# Altium PCB PCB1.PcbDoc (part 2 of 3)
Units mm, origin at the board's own origin, x right, y up, seen from the top; angles counter-clockwise.
Board outline 131.32 x 71.5 mm, 2 copper layers (Top Layer, Bottom Layer); 122 components, 132 nets, 671 pads, 363 vias.
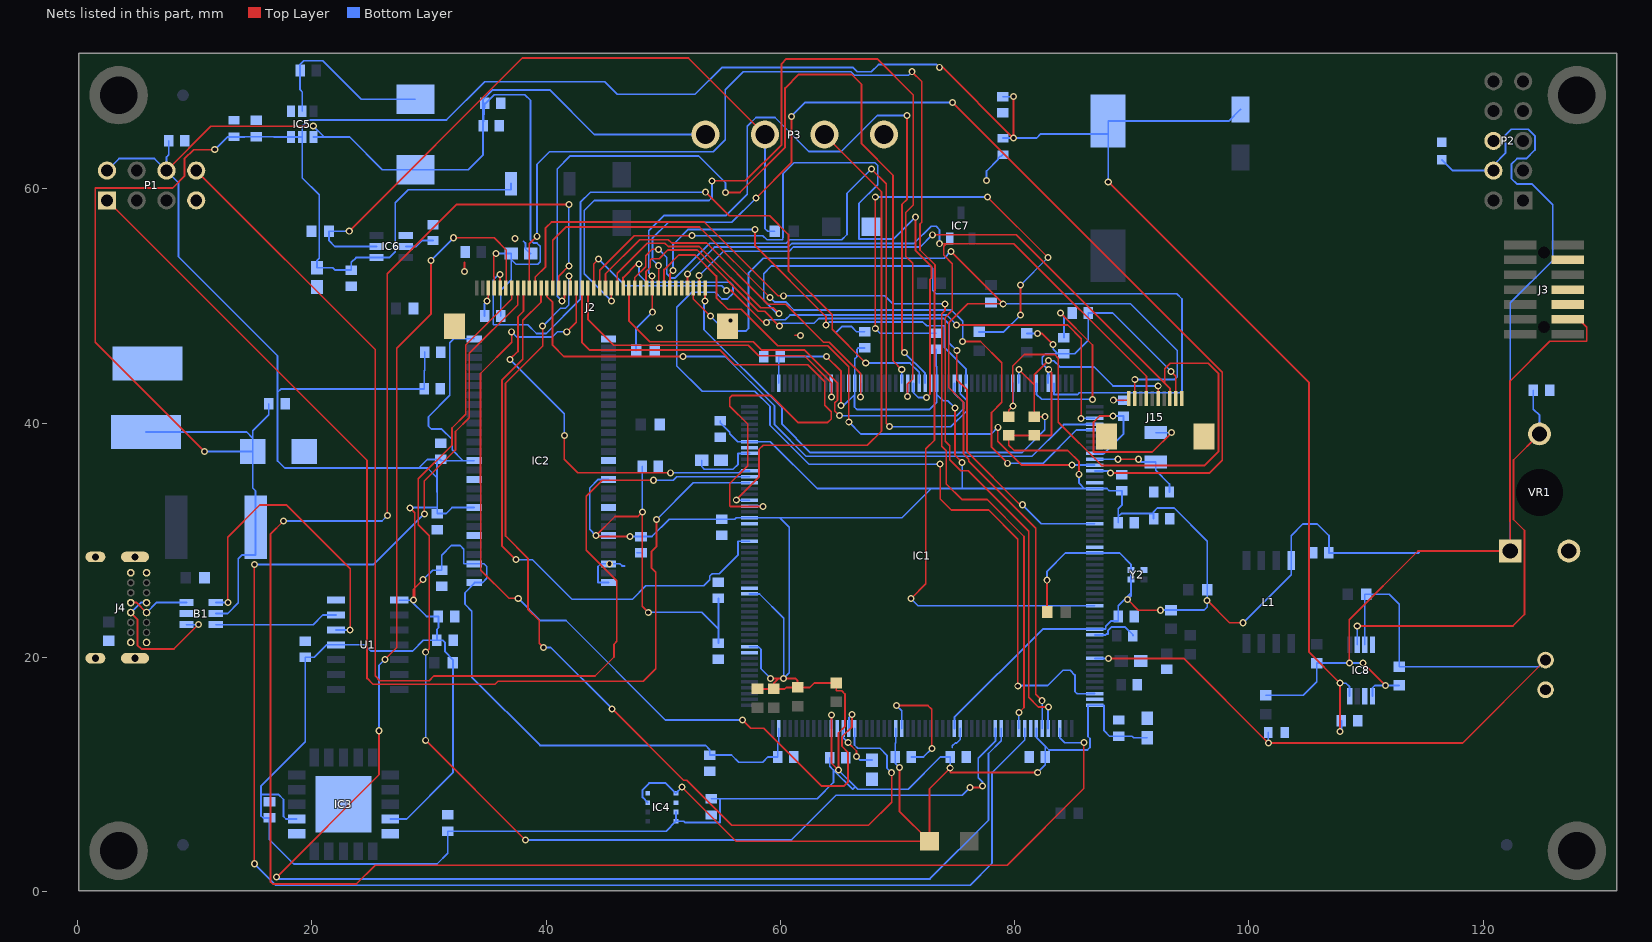
[diagram p2: the nets of this part, all layers, seen from the top]

## Via types
v1: diameter 0.6, hole 0.35, Top Layer to Bottom Layer, 363 vias

## Nets (pads, with @x,y where several pads share a name; then routed paths per layer and width w, separated by ;. In a path a pad name is that pad's centre, name@x,y a point inside that pad or via, vN(x,y) a via of type N, cw(c..) or ccw(c..) an arc to the next point about the centre after c; other vN are vias at no path point)
3V3: "Ferrite Chip Bead.1" C3.1 C4.2 C9.2 C10.2 C11.2 C12.2 C13.2 C14.2 C15.2 C16.2 C17.2 C18.2 C19.2 C20.2 C21.2 C24.2 C25.2 C26.2 C27.2 C28.2 C29.2 C30.2 C33.2 C34.2 C35.1 C36.2 C37.2 C46.2 C47.2 C49.2 C50.2 C51.2 C52.2 C55.2 C56.2 C57.1 C58.2 C59.1 C60.2 C61.2 C62.2 IC1.15 IC1.26 IC1.39 IC1.52 IC1.59 IC1.73 IC1.83 IC1.94 IC1.103 IC1.115 IC1.124 IC1.137 IC1.150 IC1.158 IC1.171 IC1.185 IC1.204 IC2.1 IC2.3 IC2.9 IC2.14 IC2.27 IC2.43 IC2.49 IC3.7 IC3.19 IC4.2 IC4.5 IC4.6 IC4.8 IC5.1 IC8.5 J2.4 J3.3 J15.9 L1.8 L3.2 LED1.1 P1.2 P1.6 P2.4 P3.4 R2.1 R3.2 R4.1 R6.1 R9.2 R10.2 R11.1 R12.1 R13.1 R14.1 R17.2 R18.2 R24.1 U1.1 U1.11 VR1.A1 Y2.1 Y2.4 | length 908.3
  Top Layer w0.15: P1.6@7.587,61.562 11.379,65.354 v1(20.117,65.354) ; v1(28.372,32.771) 28.778,32.365 28.778,25.93 ; v1(29.489,26.641) 28.778,25.93 ; J2.4@35.567,51.529 35.567,52.444 35.535,52.476 35.535,54.305 v1(35.712,54.483) ; v1(47.168,30.328) 44.323,30.328 v1(44.247,30.404) 45.878,32.035 47.834,32.035 v1(48.209,32.41) 48.209,24.359 v1(48.717,23.851) ; v1(51.6,8.928) 56.21,4.318 LED1.1@72.722,4.318 ; R9.2@58.039,17.31 R11.1@59.436,17.31 ; v1(59.157,18.212) 59.842,18.212 ; v1(63.925,45.687) 65.178,44.434 v1(65.178,41.521) ; v1(64.364,15.088) 64.364,10.978 v1(64.961,10.38) 64.961,13.55 65.507,14.096 65.507,16.876 65.227,17.155 64.77,17.155 R12.1@64.77,17.818 62.886,17.818 62.505,17.437 R10.2@61.468,17.437 ; v1(70.16,10.617) 70.16,6.88 LED1.1@72.722,4.318 ; v1(74.905,41.3) 74.905,37.262 v1(75.514,36.652) ; v1(81.94,47.65) 82.347,47.65 v1(83.287,46.711) ; v1(81.966,10.185) 74.494,10.185 v1(74.494,10.566) 72.722,8.794 LED1.1@72.722,4.318 ; R4.1@82.766,23.876 v1(82.766,26.594) ; v1(82.906,44.577) 83.134,44.348 83.134,38.976 83.109,38.951 R17.2@81.661,38.951 R18.2@79.502,38.951 79.502,38.125 79.959,37.668 84.531,37.668 85.496,36.703 v1(85.496,35.636) ; v1(89.637,24.943) 90.551,24.028 v1(92.431,24.028) ; v1(93.344,44.425) 93.75,44.018 J15.9@93.75,42.114 ; v1(96.431,24.867) 98.336,22.962 v1(99.502,22.962) ; v1(108.572,19.52) 108.56,19.533 108.56,23.216 114.427,29.083 VR1.A1@122.308,29.083 122.308,31.558 122.283,31.583 122.283,43.594 125.679,46.99 128.841,46.99 128.841,48.184 128.163,48.862 J3.3@127.221,48.862 ; v1(109.741,19.52) v1(111.646,17.615) ; 28.778,25.93 28.677,25.828 v1(28.677,24.892) 28.778,24.994 28.778,25.93 ; R11.1@59.436,17.31 59.436,17.805 59.842,18.212 ; R11.1@59.436,17.31 60.376,17.31 60.503,17.437 R10.2@61.468,17.437 ; 59.842,18.212 v1(60.274,18.212) 61.265,18.212 61.468,18.009 R10.2@61.468,17.437
  Bottom Layer w0.15: P1.2@2.507,61.562 3.531,62.586 6.563,62.586 P1.6@7.587,61.562 ; C57.1@7.786,64.102 7.786,62.912 7.587,62.713 P1.6@7.587,61.562 ; IC3.7@18.7,6.21 17.793,6.21 17.577,6.426 17.577,7.874 17.145,8.306 15.646,8.306 ; v1(20.117,65.354) 21.031,64.44 ; IC5.1@20.127,64.433 20.127,64.44 21.031,64.44 ; IC3.19@26.7,6.21 28.092,6.21 32.042,10.16 R24.1@32.042,19.558 32.042,19.812 31.373,20.481 31.373,21.26 31.17,21.463 C60.2@30.679,21.463 ; U1.1@27.465,24.892 v1@28.397,24.892 ; v1(28.372,32.771) 28.402,32.801 30.698,32.801 ; v1(28.677,24.892) v1@28.397,24.892 ; v1(29.489,26.641) 30.302,27.454 C28.2@31.082,27.454 31.082,28.737 31.902,29.557 32.656,29.557 32.969,29.244 32.969,27.997 IC2.3@33.863,27.997 34.69,27.997 34.925,27.762 34.925,26.746 34.576,26.397 IC2.1@33.934,26.397 ; C30.2@29.63,46.068 29.63,44.514 29.591,44.475 C55.2@29.591,42.926 17.374,42.926 17.069,42.621 ; IC2.1@33.863,26.397 IC2.1@33.934,26.397 ; IC2.9@33.863,32.797 31.971,32.797 31.454,32.28 C25.2@30.701,32.28 ; IC2.14@33.863,36.797 32.901,36.797 ; IC2.27@33.863,47.197 32.106,47.197 31.775,46.867 31.775,42.367 29.955,40.547 29.955,39.751 30.209,39.497 31.09,39.497 31.979,38.608 31.979,37.719 32.901,36.797 ; C46.2@34.743,67.31 C46.2@34.743,67.23 ; v1(35.712,54.483) C35.1@37.019,54.483 37.019,53.975 ; C34.2@36.123,49.149 36.123,51.359 37.019,52.255 37.019,53.975 ; IC2.49@45.319,30.397 44.254,30.397 v1(44.247,30.404) 43.713,30.937 43.713,34.468 44.443,35.197 IC2.43@45.319,35.197 ; v1(47.168,30.328) 47.171,30.324 C29.2@48.1,30.324 49.027,30.324 50.508,31.805 C19.2@54.991,31.805 56.109,31.805 56.223,31.919 IC1.137@57.365,31.919 59.944,31.919 ; C26.2@48.205,36.322 48.205,32.415 v1(48.209,32.41) ; IC4.2@48.678,7.606 48.235,8.049 48.235,8.715 48.791,9.271 50.213,9.271 IC4.8@51.078,8.406 v1(51.6,8.928) ; v1(48.717,23.851) 53.289,23.851 54.704,22.436 ; IC4.6@51.078,6.806 IC4.5@51.078,6.006 ; P3.4@53.594,64.643 44.12,64.643 40.31,68.453 35.433,68.453 34.616,67.636 C46.2@34.616,67.103 ; C36.2@54.102,7.929 54.839,7.929 ; C49.2@54.704,21.231 54.704,22.436 ; C20.2@54.704,25.058 54.704,22.436 ; C18.2@54.864,40.187 54.864,40.031 55.675,39.22 55.675,39.092 56.348,38.419 IC1.150@57.365,38.419 59.139,38.419 63.139,34.419 72.875,34.419 ; IC1.115@57.365,20.919 58.115,20.919 58.344,20.69 58.344,19.025 v1(59.157,18.212) ; IC1.124@57.365,25.419 58.214,25.419 60.274,23.358 v1(60.274,18.212) 60.757,18.694 60.757,31.106 59.944,31.919 ; IC1.103@59.853,13.931 59.853,12.74 59.762,12.649 C50.2@59.762,11.5 58.921,11.5 58.483,11.062 56.427,11.062 55.822,11.667 C33.2@53.975,11.667 53.975,12.116 53.602,12.488 39.48,12.488 33.655,18.313 33.655,23.956 33.074,24.536 33.074,25.531 33.899,26.361 IC2.1@33.934,26.397 ; IC1.158@59.853,43.407 59.853,45.687 C16.2@59.966,45.687 v1(63.925,45.687) ; C51.2@64.207,11.43 64.207,10.706 64.533,10.38 ; IC1.94@64.353,13.931 64.353,15.077 v1(64.364,15.088) ; v1(64.961,10.38) 66.39,8.952 ; v1(65.178,41.521) 65.405,41.521 66.319,42.435 ; C15.2@67.183,46.427 66.65,46.427 66.535,46.312 66.535,45.682 66.353,45.5 IC1.171@66.353,43.407 66.353,42.469 66.319,42.435 ; IC1.83@69.853,13.931 69.853,12.733 69.795,12.675 C52.2@69.795,11.5 69.795,10.982 v1(70.16,10.617) ; C14.2@73.279,46.3 73.279,44.88 73.353,44.806 IC1.185@73.353,43.407 73.353,42.446 ; v1(74.494,10.566) C58.2@74.494,11.5 73.66,11.5 70.898,8.738 66.604,8.738 66.39,8.952 ; IC1.73@74.853,13.931 74.853,14.884 82.388,22.419 IC1.39@86.841,22.419 87.779,22.419 87.779,22.657 88.24,23.118 88.845,23.118 C10.2@88.845,23.495 88.845,24.417 89.92,25.492 ; v1(74.905,41.3) 74.295,41.91 73.889,41.91 73.353,42.446 ; v1(75.514,36.652) 75.514,34.419 ; R2.1@81.026,47.663 81.928,47.663 v1(81.94,47.65) ; IC1.59@81.853,13.931 81.853,13.174 82.605,12.422 ; v1(81.966,10.185) 82.605,10.825 C17.2@82.605,11.5 82.605,12.422 ; v1(82.766,26.594) 82.766,27.357 84.328,28.919 IC1.26@86.841,28.919 88.966,28.919 89.92,27.965 Y2.1@89.92,27.451 Y2.4@89.92,26.651 89.92,25.492 ; v1(82.906,44.577) v1@82.879,44.551 ; v1(83.287,46.711) 83.287,46.304 83.672,45.919 ; v1(85.496,35.636) 85.496,34.874 85.952,34.419 ; C24.2@88.845,31.496 88.845,32.029 ; v1(89.637,24.943) 89.92,25.226 89.92,25.492 ; C3.1@91.313,13.143 90.155,13.143 90.018,13.28 C9.2@88.9,13.28 88.091,13.28 87.63,13.741 87.63,15.919 IC1.52@86.841,15.919 86.258,15.919 86.258,13.248 86.428,13.078 86.428,12.319 86.208,12.1 82.927,12.1 82.605,12.422 ; C12.2@91.86,31.844 C12.2@91.86,32.283 ; v1(92.431,24.028) 92.443,24.041 93.345,24.041 96.164,24.041 96.431,24.308 v1(96.431,24.867) R3.2@96.431,25.781 96.431,29.934 93.599,32.766 92.19,32.766 91.86,32.436 C12.2@91.86,32.283 ; v1(93.344,44.425) 88.365,49.403 C56.2@86.288,49.403 86.288,47.066 85.141,45.919 C13.2@84.201,45.919 83.672,45.919 ; v1(99.502,22.962) 103.599,27.059 L1.8@103.599,28.282 103.599,30.404 104.59,31.394 105.838,31.394 106.829,30.404 C21.2@106.829,28.923 114.478,28.923 114.638,29.083 VR1.A1@122.308,29.083 122.308,50.267 125.933,53.892 125.933,58.649 124.155,60.427 122.86,60.427 122.403,60.884 122.403,62.103 122.885,62.586 123.674,62.586 124.411,63.322 124.411,64.541 123.85,65.102 122.403,65.102 121.895,64.594 121.895,63.043 120.871,62.019 P2.4@120.871,61.562 117.393,61.562 C59.1@116.459,62.496 ; R6.1@101.44,16.769 104.648,16.769 105.791,17.912 R13.1@105.791,19.52 v1(108.572,19.52) v1(109.741,19.52) ; IC8.5@110.543,16.69 110.543,17.399 110.759,17.615 v1(111.646,17.615) R14.1@112.838,17.615 ; P1.6@7.587,61.562 8.611,60.538 8.611,54.204 17.069,45.745 17.069,42.621 ; 15.646,8.306 15.646,9.017 19.431,12.802 C61.2@19.431,20.011 20.193,20.011 21.264,21.082 U1.11@22.065,21.082 24.486,21.082 25.019,20.549 28.6,20.549 29.515,21.463 C60.2@30.679,21.463 ; 15.646,8.306 15.646,6.498 15.85,6.295 C4.2@16.383,6.295 16.383,4.444 18.464,2.362 30.683,2.362 31.59,3.269 C37.2@31.59,5.17 50.242,5.17 IC4.5@51.078,6.006 ; 17.069,42.621 17.069,36.779 17.678,36.17 29.113,36.17 ; 21.031,64.44 23.216,64.44 26.012,61.643 L3.2@28.829,61.643 33.343,61.643 34.616,62.916 C47.2@34.616,65.405 ; v1@28.397,24.892 29.794,23.495 C62.2@30.806,23.495 30.806,22.53 30.679,22.403 C60.2@30.679,21.463 ; 29.113,36.17 29.87,36.17 30.683,35.357 ; 29.113,36.17 29.845,36.902 C27.2@30.683,36.902 ; 30.683,35.357 C27.2@30.683,36.902 ; 30.683,35.357 30.698,32.801 ; 30.683,35.357 30.701,35.339 30.701,32.801 ; C27.2@30.683,36.902 C27.2@30.988,36.902 30.988,36.797 32.901,36.797 ; 30.698,32.801 C25.2@30.701,32.28 ; 30.698,32.801 30.701,32.801 ; C25.2@30.701,32.28 30.701,32.801 ; C47.2@34.616,65.405 C46.2@34.616,67.103 ; C47.2@34.616,65.405 C46.2@34.743,67.23 ; C46.2@34.616,67.103 C46.2@34.743,67.23 ; C46.2@34.743,67.23 35.56,68.047 38.176,68.047 38.667,67.556 38.667,55.643 38.938,55.372 39.218,55.372 39.497,55.093 39.497,53.772 39.294,53.569 37.425,53.569 37.019,53.975 ; IC4.5@51.078,6.006 51.754,6.006 51.841,5.918 54.839,5.918 54.839,7.929 ; 54.839,7.929 63.128,7.929 64.533,9.334 64.533,10.38 ; 59.944,31.919 70.375,31.919 72.875,34.419 ; 64.533,10.38 66.176,8.738 66.39,8.952 ; 66.319,42.435 66.319,41.377 66.523,41.173 72.743,41.173 73.353,41.783 73.353,42.446 ; 72.875,34.419 75.514,34.419 ; 75.514,34.419 85.952,34.419 ; v1@82.879,44.551 82.355,45.075 82.355,45.644 82.63,45.919 83.672,45.919 ; v1@82.879,44.551 82.853,44.524 IC1.204@82.853,43.407 v1@82.879,44.551 ; 85.952,34.419 IC1.15@86.841,34.419 87.884,34.419 88.068,34.235 C11.2@89.154,34.235 89.154,32.999 88.845,32.69 88.845,32.029 ; 88.845,32.029 89.099,32.283 C12.2@91.86,32.283
+5: +5.1 B1.5 C32.1 C39.2 C42.2 C44.2 C45.2 C48.2 C53.2 C54.2 D1.1 D5.1 F1.2 IC5.2 IC5.3 IC6.1 IC8.8 L2.1 LS1.1 | length 272
  Top Layer w0.15: v1(10.82,37.592) 1.499,46.914 1.499,60.071 8.103,60.071 9.119,61.087 9.119,62.56 9.906,63.348 v1(11.708,63.348) ; v1(73.584,70.383) 73.845,70.383 v1(79.891,64.337) v1(79.891,67.873) ; v1(87.986,60.604) 105.131,43.459 105.131,20.447 v1(107.772,17.805) v1(107.772,13.691)
  Bottom Layer w0.15: +5.1@5.842,39.243 14.427,39.243 14.945,38.725 ; v1(10.82,37.592) D1.1@14.945,37.592 ; v1(11.708,63.348) 12.802,64.441 C53.2@13.335,64.441 14.275,64.441 14.295,64.461 C48.2@15.24,64.461 16.713,64.461 16.741,64.433 IC5.3@18.227,64.433 IC5.2@19.177,64.433 ; B1.5@11.791,23.749 12.802,23.749 13.711,24.658 13.711,28.427 14.021,28.737 15.196,28.737 F1.2@15.196,31.115 15.196,34.214 14.945,34.465 D1.1@14.945,37.592 ; C42.2@16.328,41.656 16.328,40.734 14.945,39.351 14.945,38.725 ; L2.1@36.997,60.452 36.997,59.919 28.219,59.919 27.127,58.826 27.127,54.643 26.619,54.135 IC6.1@25.514,54.135 23.774,54.135 23.368,53.729 C54.2@23.368,53.069 22.002,53.069 21.793,53.278 C32.1@20.447,53.278 20.447,53.899 20.625,54.077 20.625,59.487 19.177,60.935 IC5.2@19.177,64.433 ; v1(73.584,70.383) 73.355,70.612 68.368,70.612 67.767,70.011 66.565,70.011 66.218,70.358 54.991,70.358 52.705,68.072 46.076,68.072 45.009,69.139 34.747,69.139 31.496,65.888 19.71,65.888 19.177,65.354 IC5.2@19.177,64.433 ; C44.2@78.994,64.337 v1(79.891,64.337) 81.864,64.337 82.221,64.694 LS1.1@87.978,64.694 ; C45.2@78.994,67.873 v1(79.891,67.873) ; v1(87.986,60.604) 87.978,60.612 LS1.1@87.978,64.694 ; D5.1@99.281,66.787 98.282,65.788 LS1.1@87.978,65.788 LS1.1@87.978,64.694 ; v1(107.772,13.691) 107.895,13.813 C39.2@107.895,14.605 ; v1(107.772,17.805) 108.285,17.805 108.593,17.497 IC8.8@108.593,16.69 ; D1.1@14.945,37.592 14.945,38.725
D+: B1.1 J4.A6 J4.B6 | length 11.9
  Top Layer w0.15: J4.B6@4.534,23.832 5.105,23.261 5.105,21.057 5.436,20.726 8.23,20.726 v1(10.312,22.809)
  Bottom Layer w0.15: J4.B6@4.534,23.832 5.384,24.682 J4.A6@5.884,24.682 ; B1.1@9.291,22.799 10.302,22.799 v1(10.312,22.809)
D-: B1.3 J4.A7 J4.B7 | length 5.5
  Top Layer w0.15: J4.B7@4.534,24.682 5.034,24.682 J4.A7@5.884,23.832
  Bottom Layer w0.15: J4.A7@5.884,23.832 6.751,24.699 B1.3@9.291,24.699
ESP_RX: IC1.143 P1.1 | length 97.7
  Top Layer w0.15: P1.1@2.507,59.022 24.714,36.815 24.714,18.212 25.222,17.704 35.636,17.704 35.89,17.958 48.285,17.958 49.352,19.025 49.352,27.28 48.984,27.647 48.984,29.032 49.428,29.476 v1(49.428,31.775)
  Bottom Layer w0.15: v1(49.428,31.775) 52.572,34.919 IC1.143@57.365,34.919
ESP_TX: IC1.144 P1.8 | length 100.4
  Top Layer w0.15: P1.8@10.127,61.562 25.4,46.289 25.4,18.423 25.806,18.017 30.009,18.017 30.407,18.415 44.167,18.415 45.791,20.039 45.791,21.124 46.036,21.369 46.036,26.544 43.422,29.158 43.422,33.77 44.78,35.128 v1(49.174,35.128)
  Bottom Layer w0.15: v1(49.174,35.128) 50.865,35.128 51.156,35.419 IC1.144@57.365,35.419
GND: B1.2 C1.1 C2.1 C3.2 C4.1 C5.2 C6.2 C7.2 C8.1 C9.1 C10.1 C11.1 C12.1 C13.1 C14.1 C15.1 C16.1 C17.1 C18.1 C19.1 C20.1 C21.1 C22.1 C23.1 C24.1 C25.1 C26.1 C27.1 C28.1 C29.1 C30.1 C31.1 C32.2 C33.1 C34.1 C35.2 C36.1 C37.1 C38.1 C39.1 C40.1 C41.1 C42.1 C44.1 C45.1 C46.1 C47.1 C48.1 C49.1 C50.1 C51.1 C52.1 C53.1 C54.1 C55.1 C56.1 C57.2 C58.1 C59.2 C60.1 C61.1 C62.1 D1.2 GND.1 IC1.14 IC1.25 IC1.40 IC1.51 IC1.60 IC1.72 IC1.82 IC1.93 IC1.114 IC1.125 IC1.136 IC1.149 IC1.170 IC1.184 IC1.202 IC2.6 IC2.12 IC2.28 IC2.41 IC2.46 IC2.52 IC2.54 IC3.6 IC3.20 IC3.21 IC4.1 IC4.7 IC5.4 IC6.4 IC7.2 IC8.4 IC8.6 J2.3 J2.29 J2.35 J2.36 J2.41 J2.42 J3.5 J3.7 J3.11 J4.A1 J4.A12 J4.B1 J4.B12 J4.S1 J4.S2 J4.S3 J4.S4 J15.1 J15.10 J15.11 J15.12 LED2.2 P1.7 P2.6 P3.1 Q1.1 R1.2 R7.1 R8.1 R16.2 R21.1 R22.1 R23.1 R26.1 U1.14 VR1.E1 Y2.2 | length 95.6
  Top Layer w0.15: v1(33.02,52.959) 33.02,53.721 ; v1(34.95,50.444) 35.067,50.561 J2.3@35.067,51.529 ; v1@37.338,55.499 v1(37.338,55.753) ; 61.214,47.498 v1(61.722,47.498) ; v1(68.097,48.082) v1(68.097,59.309) ; v1(69.901,15.9) 72.593,15.9 72.923,15.57 v1(72.923,12.217) ; v1(77.673,59.309) v1(82.842,54.14) ; v1(80.493,49.225) v1(80.493,51.791) ; v1(83.918,49.399) 86.639,46.678 v1(86.639,42.037) ; v1(88.417,41.961) 89.75,41.961 J15.1@89.75,42.114
  Bottom Layer w0.15: C34.1@34.743,49.149 34.743,50.237 v1(34.95,50.444) ; 38.065,55.534 38.227,55.372 38.227,54.914 38.658,54.483 C35.2@38.673,54.483 ; IC2.54@45.319,26.397 44.425,26.397 44.425,27.762 44.659,27.997 IC2.52@45.319,27.997 ; v1(45.409,27.997) 46.298,27.997 46.482,27.813 46.711,27.813 ; C29.1@47.764,28.944 C29.1@48.1,28.944 ; v1@49.403,48.133 v1(49.657,48.133) ; v1@55.626,48.768 v1(55.753,48.768) ; 64.735,47.717 65.278,48.26 66.04,48.26 66.493,47.807 C15.1@67.183,47.807 ; v1(68.097,48.082) 68.5,47.68 C14.1@73.279,47.68 ; v1(68.097,59.309) v1(77.673,59.309) ; v1(69.901,15.9) 70.353,15.448 IC1.82@70.353,13.931 ; C52.1@71.175,11.5 72.206,11.5 v1(72.923,12.217) ; 74.676,12.319 74.676,12.446 74.93,12.7 75.057,12.7 75.353,12.996 IC1.72@75.353,13.931 ; R1.2@76.962,47.79 79.057,47.79 v1(80.493,49.225) ; v1(77.597,60.706) 77.597,61.52 78.599,62.522 78.599,62.627 78.762,62.79 78.867,62.79 C44.1@78.994,62.917 ; v1(80.493,51.791) v1(82.842,54.14) ; IC1.202@81.853,43.407 81.853,42.48 82.296,42.037 v1(86.639,42.037) ; v1(83.918,49.399) 84.201,49.116 C13.1@84.201,47.299 ; IC1.40@86.841,21.919 87.745,21.919 87.832,22.007 87.974,22.007 87.974,22.315 88.252,22.593 89.439,22.593 90.098,21.934 C1.1@90.098,21.844 ; v1(88.417,41.961) 88.433,41.945 C22.1@89.281,41.945
LCD_B0: IC1.3 J2.21 | length 55.2
  Top Layer w0.15: J2.21@44.067,51.529 44.067,53.592 v1(44.475,54) ; v1(55.41,51.321) 55.816,51.321 58.547,48.59 v1(58.801,48.59) ; v1(75.032,48.387) 84.506,48.387 85.674,47.219 v1(85.674,40.411)
  Bottom Layer w0.15: v1(44.475,54) 46.748,51.727 55.003,51.727 v1(55.41,51.321) ; v1(58.801,48.59) 59.038,48.827 60.418,48.827 60.825,49.234 74.185,49.234 v1(75.032,48.387) ; v1(85.674,40.411) 85.682,40.419 IC1.3@86.841,40.419
LCD_B1: IC1.181 J2.22 | length 63.5
  Top Layer w0.15: J2.22@44.567,51.529 44.567,53.042 47.532,56.007 v1(52.451,56.007) ; v1(71.526,57.582) 71.526,54.754 72.89,53.391 72.89,52.392 72.766,52.268 72.766,42.489 v1(72.466,42.189)
  Bottom Layer w0.15: v1(52.451,56.007) 58.506,56.007 58.85,55.663 60.198,55.663 60.198,55.829 60.223,55.855 60.223,61.29 61.163,62.23 68.072,62.23 68.301,62.001 68.301,60.35 66.7,58.75 66.7,55.728 69.672,55.728 v1(71.526,57.582) ; IC1.181@71.353,43.407 71.353,42.617 71.78,42.189 v1(72.466,42.189)
LCD_B2: IC1.172 J2.23 | length 32.1
  Top Layer w0.15: J2.23@45.067,51.529 45.067,52.756 47.975,55.664 50.431,55.664 50.715,55.379 53.697,55.379 58.928,50.148 60.444,50.148 63.673,46.919 64.156,46.919 66.853,44.221 v1(66.853,42.249)
  Bottom Layer w0.15: v1(66.853,42.249) IC1.172@66.853,43.407
LCD_B3: IC1.180 J2.24 | length 76.9
  Top Layer w0.15: v1(45.567,50.444) J2.24@45.567,51.529 ; v1(54.149,60.687) 57.004,60.687 60.099,63.782 60.099,70.691 60.503,71.095 68.266,71.095 71.34,68.02 71.34,58.627 70.701,57.988 70.701,54.23 71.289,53.642 71.289,43.773 70.841,43.324 v1(70.841,42.29)
  Bottom Layer w0.15: v1(45.567,50.444) 43.242,52.769 43.242,58.152 44.099,59.009 53.9,59.009 54.149,59.258 v1(54.149,60.687) ; v1(70.841,42.29) 70.853,42.302 IC1.180@70.853,43.407
LCD_B4: IC1.205 J2.25 | length 80.8
  Top Layer w0.15: J2.25@46.067,51.529 46.067,52.8 48.631,55.364 50.131,55.364 50.415,55.079 53.078,55.079 58.309,49.848 59.397,49.848 v1(59.893,49.352)
  Bottom Layer w0.15: v1(59.893,49.352) 59.724,49.352 58.572,50.504 58.572,52.756 59.233,53.416 72.771,53.416 73,53.188 73,51.333 73.279,51.054 93.828,51.054 94.285,50.597 94.285,42.799 94.082,42.596 85.522,42.596 85.369,42.443 83.353,42.443 IC1.205@83.353,43.407
LCD_B5: IC1.50 J2.26 | length 82.8
  Top Layer w0.15: J2.26@46.567,51.529 46.567,52.426 47.735,53.594 v1(47.93,53.594) ; v1(73.635,36.5) 73.635,33.528 74.574,32.588 77.775,32.588 80.264,30.099 v1(80.264,17.551)
  Bottom Layer w0.15: v1(47.93,53.594) 47.93,52.668 48.565,52.033 55.677,52.033 55.956,51.754 55.956,51.079 55.474,50.597 55.016,50.597 54.432,51.181 52.426,51.181 51.156,49.911 51.156,44.882 53.315,42.723 57.819,42.723 59.106,41.436 59.106,39.835 62.441,36.5 v1(73.635,36.5) ; v1(80.264,17.551) 80.315,17.602 82.829,17.602 84.125,18.898 84.734,18.898 85.141,18.491 85.141,17.094 85.344,16.891 86.258,16.891 86.258,16.919 IC1.50@86.841,16.919
LCD_B6: IC1.188 J2.27 | length 39.2
  Top Layer w0.15: J2.27@47.067,51.529 47.067,48.742 48.855,46.954 57.669,46.954 58.369,46.253 62.017,46.253 64.878,43.393 64.878,41.979 64.63,41.731 64.63,41.042 v1(65.031,40.64)
  Bottom Layer w0.15: v1(65.031,40.64) 75.049,40.64 75.633,41.224 75.633,41.783 74.853,42.563 IC1.188@74.853,43.407
LCD_B7: IC1.189 J2.28 | length 62.8
  Top Layer w0.15: J2.28@47.567,51.529 47.567,52.436 48.497,53.367 48.497,54.297 49.039,54.839 v1(49.606,54.839) ; v1(67.767,61.697) 69.037,60.427 69.037,39.991 v1(69.328,39.7)
  Bottom Layer w0.15: v1(49.606,54.839) 50.3,54.144 50.3,52.756 50.669,52.387 50.982,52.387 53.958,55.363 60.5,55.363 60.788,55.651 65.227,55.651 65.684,56.109 65.684,59.614 v1(67.767,61.697) ; v1(69.328,39.7) 74.548,39.7 75.933,41.085 75.933,41.922 75.353,42.502 IC1.189@75.353,43.407
LCD_BL_CTRL: IC1.140 P3.2 | length 44.7
  Top Layer w0.15: v1(56.232,33.449) 58.162,35.378 58.162,37.753 58.522,38.112 67.421,38.112 68.631,39.322 68.631,59.766 P3.2@63.754,64.643
  Bottom Layer w0.15: v1(56.232,33.449) 56.262,33.419 IC1.140@57.365,33.419
LCD_BL_CTRL_TP: IC6.2 P3.3 R16.1 R19.2 | length 60.1
  Top Layer w0.15: v1(23.19,56.388) 37.973,71.171 52.146,71.171 P3.3@58.674,64.643
  Bottom Layer w0.15: v1(23.19,56.388) R16.1@21.451,56.388 21.451,55.601 21.967,55.085 IC6.2@25.514,55.085 ; P3.3@58.674,64.643 58.674,56.617 58.903,56.388 R19.2@59.525,56.388
LCD_DCLK: IC1.21 J2.30 | length 56.6
  Top Layer w0.15: J2.30@48.567,51.529 48.567,51.727 48.517,51.727 48.517,52.917 48.887,53.288 48.887,53.925 49.005,54.043 49.657,54.043 50.394,54.779 52.884,54.779 58.115,49.548 58.647,49.548 v1(59.91,48.285) ; v1(75.057,46.203) 75.057,43.712 75.933,42.837 75.933,37.554 80.453,33.035 v1(80.656,33.035)
  Bottom Layer w0.15: v1(59.91,48.285) 60.152,48.527 62.867,48.527 63.272,48.932 73.953,48.932 74.385,48.5 74.385,46.874 v1(75.057,46.203) ; v1(80.656,33.035) 82.271,31.419 IC1.21@86.841,31.419
LCD_DE: IC1.190 J2.34 | length 38.1
  Top Layer w0.15: J2.34@50.567,51.529 50.567,52.777 v1(50.825,53.035) ; v1(57.836,56.54) 57.836,55.149 63.881,49.104 v1(63.881,48.387)
  Bottom Layer w0.15: v1(50.825,53.035) 50.825,55.245 52.121,56.54 v1(57.836,56.54) ; v1(63.881,48.387) 63.94,48.387 64.194,48.641 72.154,48.641 72.485,48.311 74.016,48.311 74.016,46.431 75.853,44.594 IC1.190@75.853,43.407
LCD_DISP: IC1.183 J2.31 R7.2 | length 66.7
  Top Layer w0.15: v1(49.047,52.558) 49.067,52.539 J2.31@49.067,51.529 v1(49.067,49.473) ; v1(70.587,46.025) 70.383,46.228 70.383,58.699 70.815,59.131 v1(70.815,66.269)
  Bottom Layer w0.15: R7.2@47.681,46.195 47.681,48.087 v1(49.067,49.473) ; v1(49.047,52.558) 48.768,52.838 48.768,56.413 50.089,57.734 55.364,57.734 57.175,59.545 57.175,65.354 57.912,66.091 59.538,66.091 62.433,63.195 65.202,63.195 68.275,66.269 v1(70.815,66.269) ; v1(70.587,46.025) 72.353,44.258 IC1.183@72.353,43.407
LCD_G0: IC1.4 J2.13 | length 57.4
  Top Layer w0.15: J2.13@40.067,51.529 40.067,50.814 40.547,50.334 40.547,46.66 41.512,45.695 v1(51.689,45.695)
  Bottom Layer w0.15: v1(51.689,45.695) 55.272,45.695 59.504,41.462 59.504,39.861 62.187,37.177 81.475,37.177 84.176,39.878 86.04,39.878 86.081,39.919 IC1.4@86.841,39.919
LCD_G1: IC1.5 J2.14 | length 66.8
  Top Layer w0.15: J2.14@40.567,51.529 40.567,55.629 41.68,56.742 53.094,56.742 v1(59.106,50.731) ; v1(75.557,46.973) 77.081,46.973 78.892,45.161 78.892,41.78 78.027,40.915 78.027,37.949 v1(79.4,36.576)
  Bottom Layer w0.15: v1(59.106,50.731) 59.5,50.337 60.483,50.337 61.155,49.665 74.583,49.665 75.557,48.692 v1(75.557,46.973) ; v1(79.4,36.576) 82.423,36.576 85.266,39.419 IC1.5@86.841,39.419
LCD_G2: IC1.55 J2.15 | length 166.2
  Top Layer w0.15: v1(17.577,31.648) 16.459,30.531 16.459,0.864 16.662,0.66 23.8,0.66 25.4,2.261 79.35,2.261 85.903,8.814 v1(85.903,12.725) ; v1(26.441,32.106) 26.441,52.756 32.36,58.674 v1(41.935,58.674) ; J2.15@41.067,51.529 41.067,52.548 v1(41.935,53.416)
  Bottom Layer w0.15: v1(17.577,31.648) 25.984,31.648 v1(26.441,32.106) ; v1(41.935,53.416) v1(41.935,58.674) ; IC1.55@83.853,13.931 83.853,13.132 84.259,12.725 v1(85.903,12.725)
LCD_G3: IC1.179 J2.16 | length 75.2
  Top Layer w0.15: v1(41.351,50.444) 41.567,50.66 J2.16@41.567,51.529 ; v1(55.321,59.69) 56.54,59.69 60.399,63.549 60.399,68.603 61.57,69.774 66.065,69.774 66.929,68.91 66.929,63.858 69.614,61.173 69.614,45.321 v1(70.358,44.577)
  Bottom Layer w0.15: v1(41.351,50.444) 40.945,50.851 40.945,61.697 42.062,62.814 53.01,62.814 55.321,60.503 v1(55.321,59.69) ; IC1.179@70.353,43.407 70.353,44.572 v1(70.358,44.577)
LCD_G4: IC1.90 J2.17 | length 82.3
  Top Layer w0.15: v1(39.7,48.285) 39.7,46.584 36.525,43.409 36.525,30.378 38.442,28.461 38.442,24.118 39.408,23.153 39.408,21.222 v1(39.776,20.853) ; v1(41.935,52.578) 42.067,52.578 J2.17@42.067,51.529 ; v1(45.632,15.607) 51.723,9.516 52.009,9.516 55.855,5.671 67.52,5.671 69.494,7.645 v1(69.494,10.16)
  Bottom Layer w0.15: v1(39.7,48.285) 41.224,49.809 41.656,49.809 41.935,50.089 v1(41.935,52.578) ; v1(39.776,20.853) 40.386,20.853 v1(45.632,15.607) ; IC1.90@66.353,13.931 66.353,13.208 66.319,13.208 66.319,12.522 66.599,12.243 68.504,12.243 69.088,11.659 69.088,10.566 v1(69.494,10.16)
LCD_G5: IC1.91 J2.18 | length 77.3
  Top Layer w0.15: v1(37.059,47.803) 37.059,46.905 34.392,44.238 34.392,34.823 34.417,34.798 34.417,27.457 36.83,25.044 v1(37.617,25.044) ; v1(41.758,47.803) 42.567,48.612 J2.18@42.567,51.529 ; v1(56.77,14.654) 57.471,13.954 58.563,13.954 63.483,9.034 65.447,9.034 65.761,9.347 65.761,11.913 65.261,12.412 65.261,13.233 66.116,14.089 v1(66.116,15.129)
  Bottom Layer w0.15: v1(37.059,47.803) 37.503,47.359 40.525,47.359 40.969,47.803 v1(41.758,47.803) ; v1(37.617,25.044) 39.511,23.151 41.69,23.151 50.186,14.654 v1(56.77,14.654) ; IC1.91@65.853,13.931 65.853,14.866 v1(66.116,15.129)
LCD_G6: IC1.139 J2.19 | length 54.4
  Top Layer w0.15: J2.19@43.067,51.529 43.067,46.874 43.688,46.253 54.813,46.253 56.083,44.983 62.332,44.983 63.779,43.536 63.779,41.529 64.33,40.979 64.33,40.361 64.033,40.064 61.493,40.064 59.19,42.367 55.88,42.367 55.677,42.164 55.677,41.453 57.201,39.929 57.201,36.373 55.677,34.849 55.677,32.944 55.728,32.893 v1(58.496,32.893)
  Bottom Layer w0.15: IC1.139@57.365,32.919 58.47,32.919 v1(58.496,32.893)
LCD_G7: IC1.167 J2.20 | length 28.1
  Top Layer w0.15: J2.20@43.567,51.529 43.567,48.864 45.777,46.654 57.244,46.654 58.148,45.75 62.056,45.75 64.353,43.453 v1(64.353,42.251)
  Bottom Layer w0.15: v1(64.353,42.251) IC1.167@64.353,43.407
LCD_HSYNC: IC1.12 J2.32 | length 88.7
  Top Layer w0.15: J2.32@49.567,51.529 49.606,52.4 v1(49.606,53.442) ; v1(57.912,59.207) 60.935,62.23 v1(60.935,66.192) ; v1(74.676,67.386) 97.714,44.348 97.714,36.83 96.622,35.738 v1(88.189,35.738)
  Bottom Layer w0.15: v1(49.606,53.442) 49.073,53.975 49.073,55.778 50.444,57.15 55.855,57.15 v1(57.912,59.207) ; v1(60.935,66.192) 62.128,67.386 v1(74.676,67.386) ; IC1.12@86.841,35.919 88.008,35.919 v1(88.189,35.738)
LCD_INT: IC1.58 J2.38 J15.2 | length 103.3
  Top Layer w0.15: J2.38@52.567,51.529 52.567,50.597 v1(54.015,49.149) ; v1(74.549,54.661) v1(79.019,50.19) 75.991,50.19 74.374,48.573 74.374,43.042 75.633,41.783 75.633,37.383 76.084,36.932 76.084,36.742 81.791,31.036 81.791,16.863 v1(82.347,16.307) ; J15.2@90.25,42.114 v1(90.25,43.739)
  Bottom Layer w0.15: v1(54.015,49.149) 55.302,47.862 57.048,47.862 57.269,48.082 57.269,52.804 58.547,54.082 73.97,54.082 v1(74.549,54.661) ; v1(79.019,50.19) 89.891,50.19 93.878,46.203 93.878,43.942 93.675,43.739 v1(90.25,43.739) ; v1(82.347,16.307) 82.353,16.301 IC1.58@82.353,13.931
LCD_R0: IC1.182 J2.5 | length 62.1
  Top Layer w0.15: J2.5@36.067,51.529 v1(36.067,52.706) ; v1(53.619,59.715) 55.62,57.715 59.074,57.715 60.684,56.106 60.684,52.99 64.414,49.259 64.414,48.006 v1(67.285,45.136)
  Bottom Layer w0.15: v1(36.067,52.706) 35.966,52.706 35.484,52.223 35.484,48.412 38.422,48.412 39.175,47.659 40.005,47.659 42.926,50.58 42.926,58.852 43.79,59.715 v1(53.619,59.715) ; v1(67.285,45.136) 71.051,45.136 71.853,44.334 IC1.182@71.853,43.407
LCD_R1: IC1.65 J2.6 | length 140.2
  Top Layer w0.15: v1(16.993,1.245) 25.73,9.982 v1(25.73,13.741) ; v1(26.238,19.837) 27.247,20.846 27.247,46.398 30.175,49.327 v1(30.175,53.899) ; v1(32.106,55.829) 35.56,55.829 36.601,54.788 36.601,52.282 J2.6@36.567,51.529
  Bottom Layer w0.15: v1(16.993,1.245) 17.145,1.092 72.763,1.092 77.766,6.095 77.766,11.795 78.853,12.882 IC1.65@78.853,13.931 ; v1(25.73,13.741) 25.73,19.329 v1(26.238,19.837) ; v1(30.175,53.899) v1(32.106,55.829)
LCD_R2: IC1.66 J2.7 | length 101
  Top Layer w0.15: v1(29.718,12.929) v1(38.227,4.42) ; v1(29.718,20.447) 30.023,20.752 30.023,30.374 29.078,31.318 29.078,35.246 31.958,38.126 31.958,39.589 33.139,40.77 33.139,46.677 37.067,50.605 J2.7@37.067,51.529 ; v1(76.175,8.89) 77.114,8.89 v1(77.241,9.017)
  Bottom Layer w0.15: v1(29.718,12.929) v1(29.718,20.447) ; v1(38.227,4.42) 60.935,4.42 64.745,8.23 75.514,8.23 v1(76.175,8.89) ; v1(77.241,9.017) 77.241,9.398 76.896,9.743 76.896,11.395 78.353,12.852 IC1.66@78.353,13.931
LCD_R3: IC1.61 J2.8 | length 141.6
  Top Layer w0.15: v1(15.088,2.388) v1(15.088,27.94) ; v1(29.603,32.258) 29.603,35.064 32.258,37.719 32.258,39.289 33.439,40.47 33.439,45.96 37.567,50.089 J2.8@37.567,51.529
  Bottom Layer w0.15: v1(15.088,2.388) 16.916,0.559 76.2,0.559 78.066,2.425 78.066,10.167 80.853,12.954 IC1.61@80.853,13.931 ; v1(15.088,27.94) 25.285,27.94 v1(29.603,32.258)
LCD_R4: IC1.145 J2.9 | length 33.4
  Top Layer w0.15: v1(36.906,45.441) 37.592,46.126 37.592,49.08 38.067,49.555 J2.9@38.067,51.529 ; v1(41.554,38.964) 41.554,36.906 42.697,35.763 v1(50.622,35.763)
  Bottom Layer w0.15: v1(36.906,45.441) 41.554,40.792 v1(41.554,38.964) ; v1(50.622,35.763) 56.464,35.763 56.62,35.919 IC1.145@57.365,35.919
LCD_R5: IC1.35 J2.10 | length 111.6
  Top Layer w0.15: J2.10@38.567,51.529 38.567,55.306 v1(39.218,55.956) ; v1(71.145,25.019) 72.415,26.289 72.415,37.821 73.152,38.557 73.152,51.283 73.203,51.333 73.203,53.502 71.916,54.788 71.916,57.006 72.06,57.15 72.06,69.164 v1(71.222,70.002)
  Bottom Layer w0.15: v1(39.218,55.956) 39.218,62.103 40.284,63.17 54.254,63.17 55.296,64.211 55.296,68.478 56.82,70.002 66.028,70.002 66.319,69.711 70.93,69.711 v1(71.222,70.002) ; v1(71.145,25.019) 71.745,24.419 IC1.35@86.841,24.419
LCD_R6: IC1.62 J2.11 | length 83.4
  Top Layer w0.15: J2.11@39.067,51.529 39.067,52.476 39.954,53.364 39.954,56.667 40.462,57.175 53.492,57.175 59.792,50.876 v1(60.249,50.876) ; v1(74.041,50.19) 74.041,49.598 73.774,49.331 73.774,38.032 74.163,37.643 74.163,34.803 75.476,33.49 77.635,33.49 80.797,30.328 80.797,15.723 v1(80.366,15.291)
  Bottom Layer w0.15: v1(60.249,50.876) 68.91,50.876 69.596,50.19 v1(74.041,50.19) ; IC1.62@80.353,13.931 80.353,15.278 v1(80.366,15.291)
LCD_R7: IC1.133 J2.12 | length 49.3
  Top Layer w0.15: v1(37.414,28.346) 36.22,29.54 36.22,43.666 37.998,45.444 37.998,48.78 39.567,50.349 J2.12@39.567,51.529
  Bottom Layer w0.15: v1(37.414,28.346) 38.837,28.346 42.211,24.972 47.375,24.972 48.514,26.111 53.442,26.111 53.975,26.645 53.975,26.949 54.178,27.153 54.762,27.153 56.388,28.778 56.388,29.919 IC1.133@57.365,29.919
LCD_RST: IC1.57 J2.37 J15.4 | length 96.6
  Top Layer w0.15: J2.37@52.067,51.529 v1(52.067,52.727) ; v1(73.584,55.321) 74.168,55.321 ; v1(82.88,15.773) 82.017,15.773 81.204,16.586 81.204,30.759 76.022,35.941 75.387,35.941 74.463,36.865 74.463,38.075 74.074,38.464 74.074,49.022 74.676,49.624 74.676,53.619 73.939,54.356 73.939,55.093 74.168,55.321 ; J15.4@91.25,42.114 91.25,44.005 79.934,55.321 74.168,55.321
  Bottom Layer w0.15: v1(52.067,52.727) 54.378,55.039 60.678,55.039 60.985,55.347 71.407,55.347 72.88,56.82 73.287,56.82 73.584,56.523 v1(73.584,55.321) ; IC1.57@82.853,13.931 82.853,15.746 v1(82.88,15.773)
LCD_SCL: IC1.198 J2.39 J15.8 R18.1 | length 94.1
  Top Layer w0.15: J2.39@53.067,51.529 v1(53.067,52.61) ; v1(72.974,56.083) 80.144,56.083 92.812,43.415 ; R18.1@79.502,40.551 79.502,41.097 v1(79.858,41.453) ; v1@79.832,41.478 79.832,44.882 80.814,45.864 83.405,45.864 83.718,45.551 83.718,40.084 87.408,36.394 96.211,36.394 97.409,37.592 97.409,44.221 96.52,45.11 93.269,45.11 92.812,44.653 92.812,43.415 ; J15.8@93.25,42.114 93.25,42.977 92.812,43.415
  Bottom Layer w0.15: v1(53.067,52.61) 55.139,54.682 60.745,54.682 61.105,55.042 71.933,55.042 v1(72.974,56.083) ; v1@79.832,41.478 v1@79.853,41.457 ; IC1.198@79.853,43.407 v1@79.853,41.457 ; v1(79.858,41.453) v1@79.853,41.457
LCD_SDA: IC1.199 J2.40 J15.6 R17.1 | length 60.3
  Top Layer w0.15: v1(53.567,50.444) J2.40@53.567,51.529 ; v1(80.366,44.577) 81.661,43.282 ; v1(82.575,40.551) R17.1@81.661,40.551 81.661,43.282 ; v1(82.88,45.339) 81.661,44.12 81.661,43.282 ; J15.6@92.25,42.114 92.25,43.177 v1(92.253,43.18)
  Bottom Layer w0.15: v1(53.567,50.444) 53.467,50.344 53.467,48 60.141,41.326 60.141,39.9 62.55,37.49 80.62,37.49 82.575,39.446 v1(82.575,40.551) ; IC1.199@80.353,43.407 80.353,44.564 v1(80.366,44.577) ; v1(82.88,45.339) 83.337,45.339 83.871,44.806 86.766,44.806 88.392,43.18 v1(92.253,43.18)
LCD_VSYNC: IC1.11 J2.33 | length 51.3
  Top Layer w0.15: J2.33@50.067,51.529 50.067,53.111 51.312,54.356 52.731,54.356 54.534,52.553 54.534,50.724 55.524,49.733 56.642,49.733 59.757,46.619 64.031,46.619 65.837,44.813 v1(65.837,40.107) ; v1(78.562,39.649) 78.562,38.467 80.606,36.424 v1(84.887,36.424)
  Bottom Layer w0.15: v1(65.837,40.107) 66.878,39.065 77.978,39.065 v1(78.562,39.649) ; v1(84.887,36.424) 84.891,36.419 IC1.11@86.841,36.419
NetB1_4: B1.4 U1.12 | length 26.9
  Top Layer w0.15: v1(12.827,24.689) 12.827,30.277 15.57,33.02 17.805,33.02 23.266,27.559 v1(23.266,22.352)
  Bottom Layer w0.15: B1.4@11.791,24.699 12.817,24.699 v1(12.827,24.689) ; U1.12@22.065,22.352 v1(23.266,22.352)
NetB1_6: B1.6 U1.13 | length 10.6
  Bottom Layer w0.15: B1.6@11.791,22.799 20.107,22.799 20.93,23.622 U1.13@22.065,23.622
NetC6_1: C6.1 IC1.148 | length 5.8
  Bottom Layer w0.15: C6.1@53.275,36.83 53.275,36.297 53.506,36.065 55.954,36.065 56.388,36.5 56.388,37.419 IC1.148@57.365,37.419
NetC7_1: C7.1 IC1.92 | length 4.3
  Top Layer w0.15: v1(65.786,12.725) 66.497,12.014 v1(66.497,11.532)
  Bottom Layer w0.15: IC1.92@65.353,13.931 65.353,13.158 v1(65.786,12.725) ; v1(66.497,11.532) 66.788,11.241 C7.1@67.818,11.241
NetC22_2: C22.2 IC1.9 Y1.1 | length 18.7
  Top Layer w0.15: v1(88.382,40.605) 87.239,40.605 86.725,40.091 86.725,37.539 91.741,37.539 v1(93.394,39.192)
  Bottom Layer w0.15: IC1.9@86.841,37.419 87.635,37.419 89.281,39.065 C22.2@89.281,40.605 v1(88.382,40.605) ; Y1.1@92.042,39.19 93.392,39.19 v1(93.394,39.192)
NetC23_2: C23.2 IC1.10 Y1.2 | length 8.3
  Top Layer w0.15: v1(88.824,36.919) v1(90.564,36.919)
  Bottom Layer w0.15: IC1.10@86.841,36.919 v1(88.824,36.919) ; v1(90.564,36.919) 90.793,36.69 Y1.2@92.042,36.69 92.042,35.976 93.22,34.798 C23.2@93.22,34.13
NetC31_2: C31.2 IC6.5 | length 2.5
  Bottom Layer w0.15: IC6.5@28.014,55.085 28.905,55.085 29.411,55.591 C31.2@30.353,55.591
NetC40_2: C40.2 IC8.2 VR1.S1 | length 36.9
  Top Layer w0.15: v1(109.243,22.682) 122.53,22.682 123.52,23.673 123.52,30.836 122.583,31.773 122.583,36.858 VR1.S1@124.808,39.083
  Bottom Layer w0.15: IC8.2@109.243,21.09 v1(109.243,22.682) ; C40.2@124.278,42.799 124.278,41.195 124.808,40.665 VR1.S1@124.808,39.083
NetC41_2: C41.2 IC1.44 IC8.3 Q1.2 R14.2 R25.2 | length 70.9
  Top Layer w0.15: v1(88.011,19.919) 94.432,19.919 v1(101.651,12.7) 118.237,12.7 Q1.2@125.316,19.779
  Bottom Layer w0.15: IC1.44@86.841,19.919 v1(88.011,19.919) ; v1(101.651,12.7) v1(101.651,12.7) C41.2@101.652,13.589 ; IC8.3@109.893,21.09 109.893,25.4 R25.2@110.02,25.4 111.963,25.4 112.838,24.526 R14.2@112.838,19.215 124.752,19.215 Q1.2@125.316,19.779
NetC43_1: C43.1 IC5.5 L3.1 | length 15.4
  Bottom Layer w0.15: IC5.5@19.177,66.631 19.177,68.275 18.995,68.457 C43.1@18.995,70.104 18.995,70.637 19.3,70.942 20.93,70.942 24.229,67.643 L3.1@28.829,67.643